# Altium PCB PCB1.PCBDOC
Units mm, origin at the board's own origin, x right, y up, seen from the top; angles counter-clockwise.
Board outline 152.4 x 101.6 mm, 2 copper layers (Top Layer, Bottom Layer); 23 components, 35 nets, 130 pads, 249 vias.
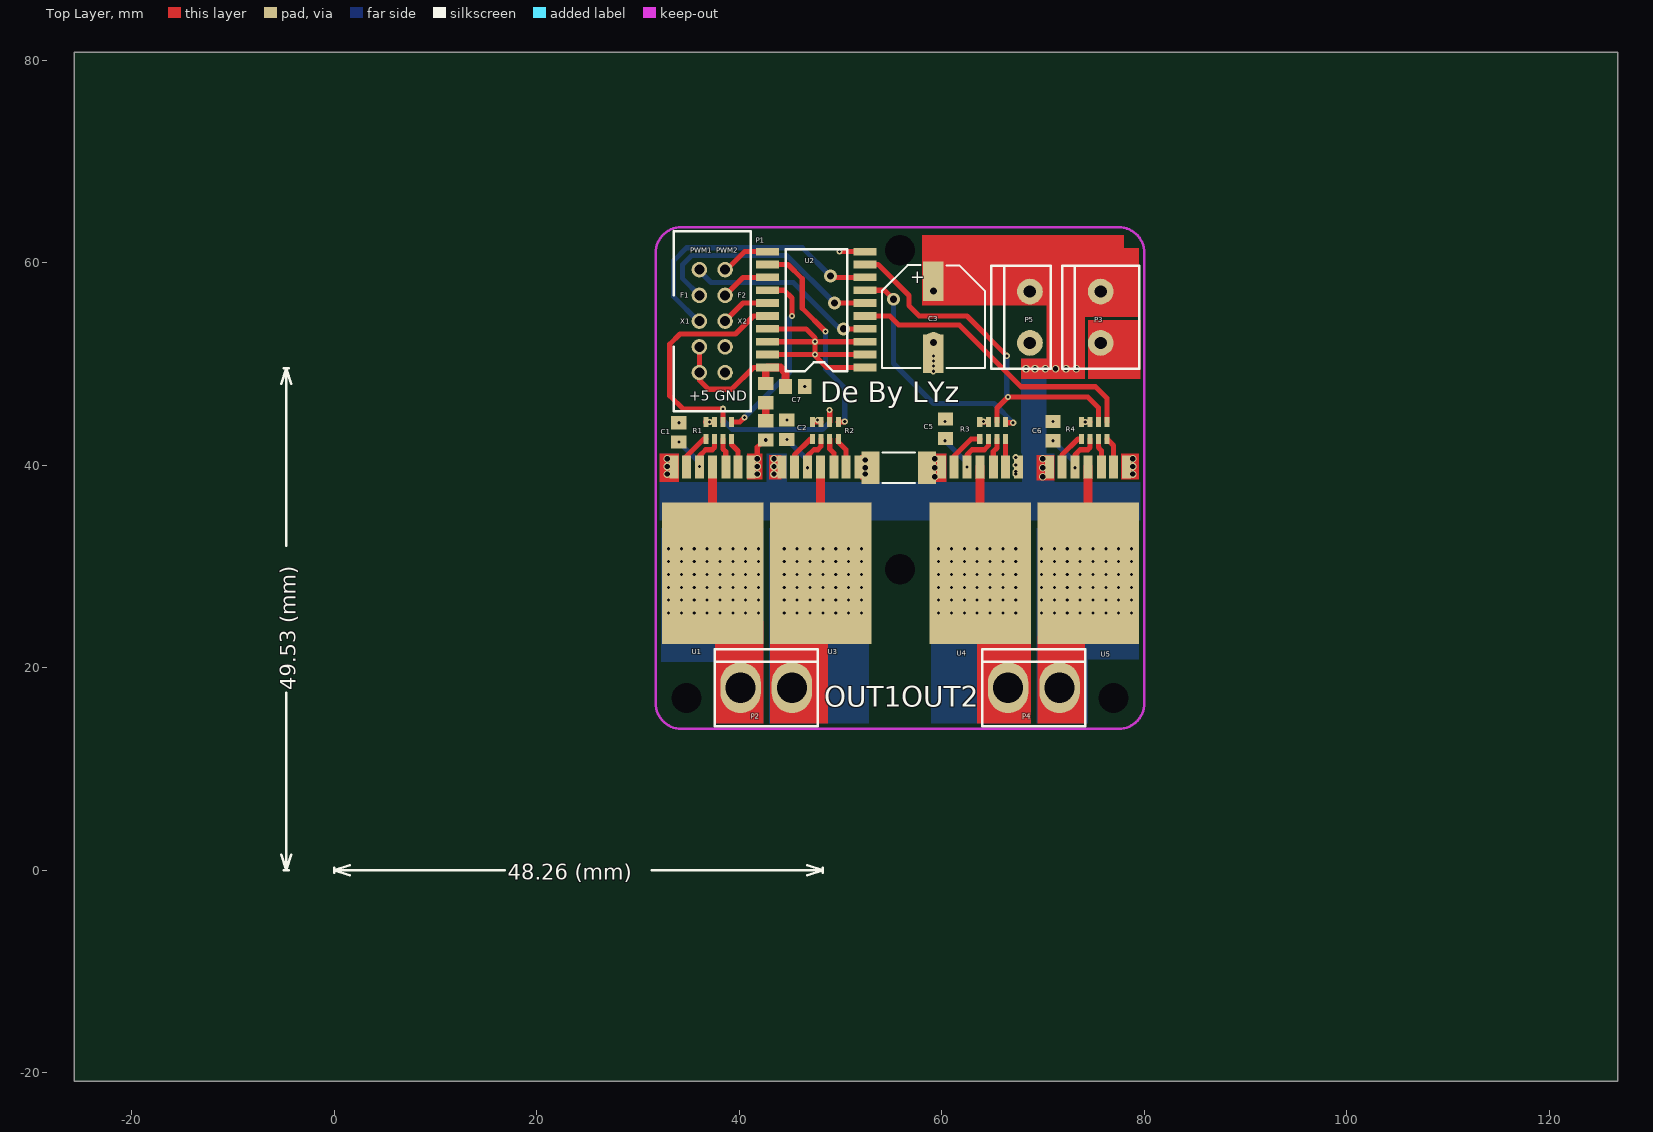
[diagram p0: Top Layer view]
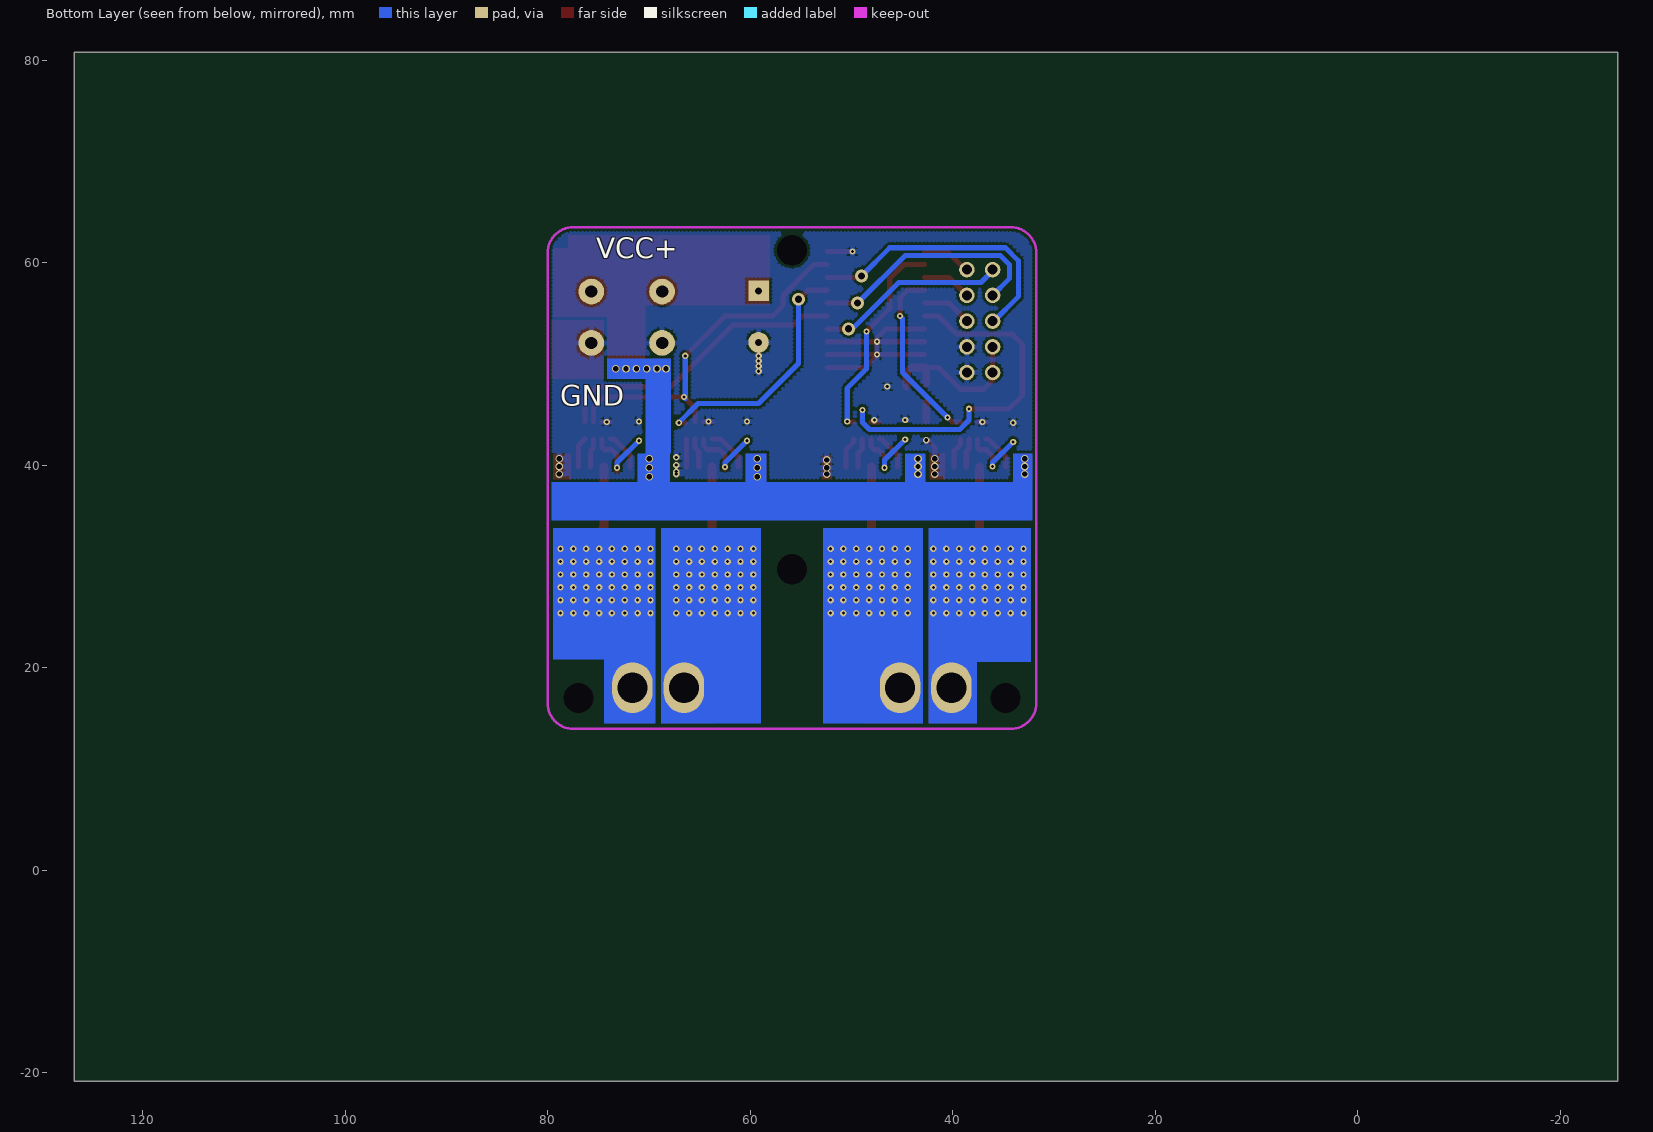
[diagram p1: Bottom Layer view, seen from below]

## Layer stack, top to bottom
Top Layer: signal copper 0.0356
Dielectric: dielectric 0.32, FR-4, Dk 4.8
Bottom Layer: signal copper 0.0356

## Board outline
-25.654,-20.828 126.746,-20.828 126.746,80.772 -25.654,80.772

## Design rules (kind name [scope] priority, off if disabled: settings)
Clearance [All] p1: gap=0.254
ComponentClearance [All] p1: gap=0.254 collisioncheckmode=3 verticalgap=0.254
PolygonConnect [All] p1: connectstyle=Relief reliefconductorwidth=0.508 reliefentries=4 polygonreliefangle="90 Angle"
RoutingVias [All] p1: holewidth=0.711 width=1.27 viastyle="Through Hole" minholewidth=0.305 minwidth=0.61 maxholewidth=12.7 maxwidth=127
SolderMaskExpansion [All] p1: expansion=0.102
TestPointUsage [All] p1: valid=0 allowmultiple=FALSE
Testpoint [All] p1: side=15 testpointundercomponent=TRUE minsize=1.016 maxsize=2.54 preferedsize=1.524 minholesize=0 maxholesize=1.016 preferedholesize=0.813 testpointgrid=0.025 style=1023 order=0123456789
Width [All] p1: maxlimit=2539.975 minlimit=0.254 preferedwidth=0.508
18 further rules are at their usual default settings.

## Classes and differential pairs
component class motordriver: C1 C2 C3 C4 C5 C6 C7 C? P1 P2 P3 P4 R1 R2 R3 R4 U1 U2 U3 U4 U5

## Components (designator, comment, footprint, x,y, rotation, side; value= is the part's Value field where it differs from the comment)
C1 "104" M0805 34.036,44.196 r270 top
C2 "104" M0805 44.704,44.45 r270 top
C3 "Cap Pol1" C2 59.182,54.61 r180 top
C5 "104" M0805 60.376,44.552 r270 top
C6 "104" M0805 70.993,44.323 r270 top
C7 "104" M0805 44.577,47.777 r0 top
P1 "Header 5X2" ISP 36.068,59.309 r0 top
P2 "Header 2" 2P 42.672,18.034 r0 top
P3 "Header 2" 2p#1 75.692,54.61 r90 top
P4 "Header 2" 2p#2 69.088,18.034 r0 top
P5 "Header 2" 2p#1 68.707,54.61 r90 top (schematic designator P3)
R1 "A" 排阻 37.973,43.434 r180 top
R2 "A" 排阻 48.514,43.434 r180 top
R3 "A" 排阻 65.024,43.434 r180 top
R4 "A" 排阻 75.057,43.434 r180 top
U1 "bts7960" bts7960 41.656,34.798 r0 top
U2 "74ALS244B" 244 46.609,55.372 r90 top
U3 "bts7960" bts7960 52.324,34.798 r0 top
U4 "bts7960" bts7960 68.072,34.798 r0 top
U5 "bts7960" bts7960 78.74,34.798 r0 top
? "Comment" 2012[0805] 42.621,47.117 r90 top
? "Comment" 2012[0805] 42.621,43.434 r90 top
? "Comment" 6332[2512] 55.753,39.751 r0 top

## Footprints (in the part's own frame and the unit in brackets; to place one, negate y for a bottom-side part, rotate by r counter-clockwise, add the part's x,y. Pads: shape width x height; smd on the part's side, far side on the other; paste and mask are expansions set on the pad)
2P [mm]
  oval 4x5 hole 3: 1(-2.54,0) 2(2.54,0)
  silkscreen extent -5.08,-3.81 5.08,3.81
2p#1 [mil]
  round 100 hole 48: 1(-100,0) 2(100,0)
  silkscreen extent -200,-150 200,150
2p#2 [mil]
  oval 157.48x196.85 hole 118.11: 1(-100,0) 2(100,0)
  silkscreen extent -200,-150 200,150
244 [mil]
  rect 30x90 smd: 1(-225,-228.74) 2(-175,-228.74) 3(-125,-228.74) 4(-75,-228.74) 5(-25,-228.74) 6(25,-228.74) 7(75,-228.74) 8(125,-228.74) 9(175,-228.74) 10(225,-228.74) 11(225,150) 12(175,150) 13(125,150) 14(75,150) 15(25,150) 16(-25,150) 17(-75,150) 18(-125,150) 19(-175,150) 20(-225,150)
2012[0805] [mm] "Chip Resistor; Body 2.0 x 1.3 mm (LxW typ)"
  rect 1.3x1.5 smd: 1(-0.95,0) 2(0.95,0)
6332[2512] [mm] "Chip Resistor; Body 6.3 x 3.2 mm (LxW typ)"
  rect 1.8x3.2 smd: 1(-2.8,0) 2(2.8,0)
  silkscreen extent -1.6,-1.5 1.6,1.5
bts7960 [mil]
  rect 35x90 smd: 1(-18.9,198.11) 2(-70.08,198.11) 3(-117.32,198.11) 4(-168.5,198.11) 5(-219.68,198.11) 6(-270.87,198.11) 7(-318.11,198.11)
  rect 393.7x551.18 smd: 8(-168.5,-215.28)
C2 [mil]
  rect 80x80 hole 27.56: 1(0,-102.5)
  rect 80x150 smd: 1(0,-142.5) 2(0,142.5)
  round 80 hole 27.56: 2(0,97.5)
  silkscreen extent -200,-202 200,198
ISP [mil]
  round 60 hole 39.37: 1(0,0) 2(100,0) 3(0,-100) 4(100,-100) 5(0,-200) 6(100,-200) 7(0,-300) 8(100,-300) 9(0,-400) 10(100,-400)
  silkscreen extent -100,-550 200,150
M0805 [mm]
  rect 1.3x1.5 smd: 1(0,0) 2(1.9,0)
排阻 [mm]
  rect 0.5x1 smd: 1(-1.27,-0.847) 2(-1.27,0.847) 3(-0.423,-0.847) 4(-0.423,0.847) 5(0.423,-0.847) 6(0.423,0.847) 7(1.27,-0.847) 8(1.27,0.847)

## Part data
C1 C2 C5 C6 C7: library part Cap, "Capacitor"
C3: "Polarized Capacitor (Radial)"
P1: "Header, 5-Pin, Dual row"
P2 P3 P4 P5: "Header, 2-Pin"
R1 R2 R3 R4: library part R1

## Free pads (board coordinates)
  round 5 on Top Overlay: 0(34.798,17.018) 0(55.88,29.718) 0(76.962,17.018)
  round 0 hole 3: 0(34.798,17.018) 0(55.88,29.718) 0(55.88,61.214) 0(76.962,17.018)
  round 1 on Top Overlay: 0(49.784,50.292)

## Via types
v1: diameter 0.635, hole 0.305, Top Layer to Bottom Layer, 189 vias
v2: diameter 0.61, hole 0.305, Top Layer to Bottom Layer, 28 vias
v3: diameter 0.762, hole 0.508, Top Layer to Bottom Layer, 27 vias
v4: diameter 1.27, hole 0.711, Top Layer to Bottom Layer, 4 vias
v5: diameter 0.635, hole 0.381, Top Layer to Bottom Layer, 1 vias

## Nets (pads, with @x,y where several pads share a name; then routed paths per layer and width w, separated by ;. In a path a pad name is that pad's centre, name@x,y a point inside that pad or via, vN(x,y) a via of type N, cw(c..) or ccw(c..) an arc to the next point about the centre after c; other vN are vias at no path point)
5V: ?.2@42.621,48.067 C7.1 P1.7 P1.9 U2.20 | length 16.2
  Top Layer w0.508: P1.7 P1.9 36.068,48.387 36.957,47.498 39.243,47.498 41.402,49.657 U2.20
  Top Layer w0.762: ?.2@42.621,48.067 U2.20@42.621,49.606 ; U2.20 44.069,49.657 44.577,49.149 C7.1
BAT: ?.2@58.553,39.751 C3.1 P3.2 P5.2 U1.7 U3.7 U4.7 U5.7
  other v3: 59.309,38.862 69.977,38.862 32.893,39.116 43.434,39.116 59.309,39.751 69.977,39.751 32.893,39.878 43.434,39.878 32.893,40.64 43.434,40.64 59.309,40.64 69.977,40.64 68.326,49.53 69.215,49.53 70.231,49.53 71.247,49.53 72.263,49.53 73.279,49.53
ENL1: P1.3 U2.6 | length 24.4
  Top Layer w0.508: v4(49.403,56.007) U2.6
  Bottom Layer w0.508: P1.3@36.068,56.388 P1.3 34.417,58.42 34.417,59.817 35.306,60.706 44.704,60.706 v4(49.403,56.007)
ENL2: P1.5 U2.8 | length 27.7
  Top Layer w0.508: v4(49.022,58.674) 49.149,58.547 U2.8
  Bottom Layer w0.508: P1.5 35.941,54.229 33.528,56.642 33.528,60.198 34.798,61.468 46.228,61.468 v4(49.022,58.674)
ENL_1: R1.1 U2.14 | length 18
  Top Layer w0.508: R1.1 40.09,44.281 v2(40.513,44.704) ; U2.14 44.45,57.277 45.212,56.515 v2(45.212,54.737)
  Bottom Layer w0.508: v2@40.488,44.679 v2(40.513,44.704) 44.958,49.149 44.958,54.483 v2(45.212,54.737)
ENL_2: R2.1 U2.12 | length 20.5
  Top Layer w0.508: U2.12 44.831,59.817 46.228,58.42 46.228,55.499 v2(48.514,53.213) ; R2.1 50.377,44.281 v2(50.419,44.323)
  Bottom Layer w0.508: v2(48.514,53.213) 48.514,49.53 50.419,47.625 v2(50.419,44.323)
ENR1: P1.4 U2.13 | length 4.9
  Top Layer w0.508: P1.4 40.386,58.547 U2.13
ENR2: P1.6 U2.15 | length 4.9
  Top Layer w0.508: P1.6 40.386,56.007 U2.15
ENR_1: R3.1 U2.7 | length 24.5
  Top Layer w0.508: U2.7 54.356,57.277 v4(55.245,56.388) ; R3.1@66.379,44.196 v2(67.056,44.196)
  Bottom Layer w0.508: v4(55.245,56.388) 55.245,50.038 59.182,46.101 65.151,46.101 v2(67.056,44.196)
ENR_2: R4.1 U2.5 | length 29.6
  Top Layer w0.508: U2.5 54.864,54.737 55.753,53.848 61.722,53.848 67.818,47.752 75.184,47.752 76.327,46.609 R4.1
GND: ?.1@42.621,42.484 ?.1@52.953,39.751 C1.1 C2.1 C3.2 C5.1 C6.1 C7.2 P1.8 P1.10 P3.1 P5.1 R1.5 R1.7 R2.5 R2.7 R3.5 R3.7 R4.5 R4.7 U1.1 U2.1 U2.2 U2.3 U2.10 U2.17 U2.18 U2.19 U3.1 U4.1 U5.1 | length 39.5
  Top Layer w0.508: R1.7 v2(37.084,44.281) R1.5 ; v3(41.783,40.64) 41.783,41.783 ?.1@42.484,42.484 ; U2.19 v2(47.498,50.927) ; U2.18 v2(47.498,52.197) ; U2.17 46.609,53.467 47.498,52.578 v2(47.498,52.197) ; R2.7 47.752,44.281 R2.5 ; v2(49.911,61.087) U2.10 ; U2.1 48.641,49.657 47.498,50.8 v2(47.498,50.927) ; U2.2 v2(47.498,50.927) ; U2.3 v2(47.498,52.197) ; R3.7 64.135,44.281 R3.5 ; R4.7 v2(74.168,44.281) R4.5 ; v2(47.498,50.927) v2(47.498,52.197)
  other v1: 67.31,39.116 67.31,39.37 67.31,40.005 67.31,40.767 47.752,44.45 59.182,49.276 59.182,49.784 59.182,50.292 59.182,50.8
  other v2: 34.036,44.196 60.325,44.323 64.135,44.323 70.993,44.323 44.704,44.45 46.477,47.777
  other v3: 41.783,39.116 52.451,39.116 78.867,39.116 52.451,39.751 41.783,39.878 78.867,39.878 52.451,40.513 78.867,40.64
  other v5: 42.621,42.484
IN_1: R1.2 U1.2 | length 3
  Top Layer w0.508: R1.2 39.243,42.037 39.876,41.404 U1.2
IN_2: R2.2 U3.2 | length 3.1
  Top Layer w0.508: R2.2 49.784,42.291 50.544,41.531 U3.2
IN_3: R3.2 U4.2 | length 2.8
  Top Layer w0.508: U4.2@66.294,39.832 R3.2
IN_4: R4.2 U5.2 | length 3
  Top Layer w0.508: R4.2 76.96,41.954 U5.2
INH_1: R1.4 U1.3 | length 2.9
  Top Layer w0.508: R1.4 38.396,41.614 38.676,41.334 U1.3
INH_2: R2.4 U3.3 | length 2.9
  Top Layer w0.508: R2.4 48.937,41.614 49.344,41.207 U3.3
INH_3: R3.4 U4.3 | length 2.9
  Top Layer w0.508: U4.3 65.092,41.343 65.447,41.698 R3.4
INH_4: R4.4 U5.3 | length 2.9
  Top Layer w0.508: R4.4 75.48,41.741 75.76,41.461 U5.3
IS_1: R1.8 U1.6 | length 3.7
  Top Layer w0.508: U1.6 34.776,40.872 36.491,42.587 R1.8
IS_2: R2.8 U3.6 | length 3.6
  Top Layer w0.508: U3.6 45.444,40.999 47.032,42.587 R2.8
IS_3: R3.8 U4.6 | length 4.3
  Top Layer w0.508: U4.6 61.192,40.872 62.907,42.587 R3.8
IS_4: R4.8 U5.6 | length 3.8
  Top Layer w0.508: U5.6 71.86,40.999 73.448,42.587 R4.8
OUT1: P2.1 U1.4 U1.8 | length 8.7
  Top Layer w0.889: U1.8@37.211,31.242 37.274,31.305 37.376,31.407 37.376,31.75 U1.4
  other v1: 33.02,25.4 34.29,25.4 35.56,25.4 36.83,25.4 38.1,25.4 39.37,25.4 40.64,25.4 41.91,25.4 33.02,26.67 34.29,26.67 35.56,26.67 36.83,26.67 38.1,26.67 39.37,26.67 40.64,26.67 41.91,26.67 33.02,27.94 34.29,27.94 35.56,27.94 36.83,27.94 38.1,27.94 39.37,27.94 40.64,27.94 41.91,27.94 33.02,29.21 34.29,29.21 35.56,29.21 36.83,29.21 38.1,29.21 39.37,29.21 40.64,29.21 41.91,29.21 33.02,30.48 34.29,30.48 35.56,30.48 36.83,30.48 38.1,30.48 39.37,30.48 40.64,30.48 41.91,30.48 33.02,31.75 34.29,31.75 35.56,31.75 36.83,31.75 38.1,31.75 39.37,31.75 40.64,31.75 41.91,31.75
OUT2: P2.2 U3.4 U3.8 | length 9.4
  Top Layer w0.889: U3.8@47.879,30.48 48.044,30.645 48.044,31.75 U3.4
  other v1: 44.45,25.4 45.72,25.4 46.99,25.4 48.26,25.4 49.53,25.4 50.8,25.4 52.07,25.4 44.45,26.67 45.72,26.67 46.99,26.67 48.26,26.67 49.53,26.67 50.8,26.67 52.07,26.67 44.45,27.94 45.72,27.94 46.99,27.94 48.26,27.94 49.53,27.94 50.8,27.94 52.07,27.94 44.45,29.21 45.72,29.21 46.99,29.21 48.26,29.21 49.53,29.21 50.8,29.21 52.07,29.21 44.45,30.48 45.72,30.48 46.99,30.48 48.26,30.48 49.53,30.48 50.8,30.48 52.07,30.48 44.45,31.75 45.72,31.75 46.99,31.75 48.26,31.75 49.53,31.75 50.8,31.75 52.07,31.75
OUT3: P4.1 U4.4 U4.8 | length 8.8
  Top Layer w0.889: U4.4 63.792,31.75 63.792,31.331 U4.8@64.008,31.115
  other v1: 59.69,25.4 60.96,25.4 62.23,25.4 63.5,25.4 64.77,25.4 66.04,25.4 67.31,25.4 59.69,26.67 60.96,26.67 62.23,26.67 63.5,26.67 64.77,26.67 66.04,26.67 67.31,26.67 59.69,27.94 60.96,27.94 62.23,27.94 63.5,27.94 64.77,27.94 66.04,27.94 67.31,27.94 59.69,29.21 60.96,29.21 62.23,29.21 63.5,29.21 64.77,29.21 66.04,29.21 67.31,29.21 59.69,30.48 60.96,30.48 62.23,30.48 63.5,30.48 64.77,30.48 66.04,30.48 67.31,30.48 59.69,31.75 60.96,31.75 62.23,31.75 63.5,31.75 64.77,31.75 66.04,31.75 67.31,31.75
OUT4: P4.2 U5.4 U5.8 | length 6.1
  Top Layer w0.889: U5.4 74.46,33.871 U5.8@74.549,33.782
  other v1: 69.85,25.4 71.12,25.4 72.39,25.4 73.66,25.4 74.93,25.4 76.2,25.4 77.47,25.4 78.74,25.4 69.85,26.67 71.12,26.67 72.39,26.67 73.66,26.67 74.93,26.67 76.2,26.67 77.47,26.67 78.74,26.67 69.85,27.94 71.12,27.94 72.39,27.94 73.66,27.94 74.93,27.94 76.2,27.94 77.47,27.94 78.74,27.94 69.85,29.21 71.12,29.21 72.39,29.21 73.66,29.21 74.93,29.21 76.2,29.21 77.47,29.21 78.74,29.21 69.85,30.48 71.12,30.48 72.39,30.48 73.66,30.48 74.93,30.48 76.2,30.48 77.47,30.48 78.74,30.48 69.85,31.75 71.12,31.75 72.39,31.75 73.66,31.75 74.93,31.75 76.2,31.75 77.47,31.75 78.74,31.75
PWM1: P1.1 U2.4 | length 18.8
  Top Layer w0.508: v4(50.292,53.467) U2.4
  Bottom Layer w0.508: P1.1 36.068,59.182 37.211,58.039 45.339,58.039 49.911,53.467 v4(50.292,53.467)
PWM2: P1.2 U2.11 | length 4.9
  Top Layer w0.508: P1.2 38.735,59.309 40.513,61.087 U2.11
PWM_1: R1.3 R2.3 U2.16 | length 37.7
  Top Layer w0.508: R1.3 v2@38.396,45.559 ; v2(38.405,45.568) 34.442,45.568 33.147,46.863 33.147,51.943 34.163,52.959 39.624,52.959 41.402,54.737 U2.16 ; R2.3 v2@48.937,45.449
  Bottom Layer w0.508: v2(38.405,45.568) 38.405,44.45 39.319,43.536 48.235,43.536 48.92,44.221 v2(48.92,45.466)
PWM_2: R3.3 R4.3 U2.9 | length 36.2
  Top Layer w0.508: U2.9 53.721,59.817 56.769,56.769 56.769,55.753 57.785,54.737 62.484,54.737 v2(66.421,50.8) ; R3.3 65.447,45.635 v2(66.548,46.736) 74.422,46.736 75.48,45.678 R4.3
  Bottom Layer w0.508: v2@66.421,46.609 66.421,46.736 v2(66.421,50.8)
SR_1: C1.2 R1.6 U1.5 | length 7
  Top Layer w0.508: U1.5 36.076,39.878 36.076,40.902 36.703,41.529 37.338,41.529 37.55,41.741 R1.6
  Bottom Layer w0.508: v2(34.036,42.296) 36.068,40.264 v2(36.068,39.878)
SR_2: C2.2 R2.6 U3.5 | length 7.2
  Top Layer w0.508: U3.5 46.744,40.902 47.371,41.529 47.752,41.529 48.091,41.868 R2.6
  Bottom Layer w0.508: v2(44.704,42.55) 46.736,40.518 v2(46.736,39.751)
SR_3: C5.2 R3.6 U4.5 | length 8
  Top Layer w0.508: U4.5@62.484,39.624 62.484,39.83 62.484,41.021 62.992,41.529 64.2,41.529 64.601,41.929 R3.6
  Bottom Layer w0.508: v2(60.325,42.418) 62.492,40.251 v2(62.492,39.83)
SR_4: C6.2 R4.6 U5.5 | length 7.8
  Top Layer w0.508: U5.5@73.152,39.37 v2(73.152,39.751) 73.152,39.83 73.152,41.021 73.66,41.529 74.422,41.529 74.634,41.741 R4.6
  Bottom Layer w0.508: v2(70.993,42.418) 73.152,40.259 v2(73.152,39.751)
pads on no net: ?.1@42.621,46.167 ?.2@42.621,44.384
copper on no net: | length 1.8
  Top Layer w0.762: 42.621,44.384 42.621,46.167

## Polygon pours and split planes (outlines as drawn)
GND on Bottom Layer "Top Layer-No Net" (hatched 90Degree grid 0 track 0.381, remove dead copper, pour order 1000): 31.75,63.5 31.75,13.97 80.01,13.97 80.01,63.5 31.75,63.5

## Keep-outs
Keep-Out Layer:
  lines w0.254: 31.75,16.51 ccw(c34.29,16.51) 34.29,13.97 77.47,13.97 ccw(c77.47,16.51) 80.01,16.51 80.01,60.96 ccw(c77.47,60.96) 77.47,63.5 34.29,63.5 ccw(c34.29,60.96) 31.75,60.96 31.75,16.51

## Other copper
Top Layer:
  rectangle net GND: 77.724,38.608 79.502,41.148
  rectangle net BAT: 69.342,38.481 71.12,41.021
  rectangle net BAT: 58.42,38.354 60.452,41.148
  rectangle net GND: 51.943,38.608 52.959,41.021
  rectangle net BAT: 42.926,38.608 44.196,41.021
  rectangle net GND: 40.767,38.608 42.291,41.148
  rectangle net BAT: 58.039,55.753 77.978,62.738
  rectangle net OUT1: 37.592,14.478 42.418,24.638
  rectangle net OUT2: 43.053,14.478 48.768,24.892
  rectangle net OUT3: 63.5,14.478 68.834,24.892
  rectangle net OUT4: 69.469,14.478 74.168,23.114
  rectangle net BAT: 70.358,48.514 74.168,58.42
  rectangle net BAT: 67.818,48.514 74.168,50.546
  rectangle net BAT: 32.131,38.354 34.036,41.148
  rectangle net BAT: 73.66,54.61 79.502,61.468
  rectangle net GND: 74.422,48.514 79.629,54.356
Bottom Layer:
  rectangle net BAT: 32.131,34.544 79.629,38.354
  rectangle net OUT4: 69.342,20.828 79.502,33.782
  rectangle net OUT3: 58.928,14.478 68.834,33.782
  rectangle net OUT2: 42.926,14.478 52.832,33.782
  rectangle net OUT1: 32.258,20.574 42.418,33.782
  rectangle net BAT: 32.131,37.084 34.036,41.148
  rectangle net BAT: 42.672,37.592 44.704,41.148
  rectangle net BAT: 58.42,37.338 60.452,41.148
  rectangle net BAT: 67.945,36.83 71.12,41.148
  rectangle net BAT: 67.818,41.148 70.358,50.546
  rectangle net BAT: 67.818,48.514 74.168,50.546
  rectangle net OUT1: 37.592,14.478 42.418,23.114
  rectangle net OUT4: 69.342,14.478 74.422,22.098

## Silkscreen, mask and mechanical layers (free items; w line width, h text height)
Top Overlay:
  lines w0.254: -5.232,1.547 -4.724,0.023 ; -5.232,48.029 -4.724,49.553 ; -4.978,0.023 -4.47,0.023 ; -4.978,49.553 -4.47,49.553 ; -4.724,17.526 -4.724,0.023 ; -4.724,32.05 -4.724,49.553 ; -4.216,1.547 -4.724,0.023 ; -4.216,48.029 -4.724,49.553 ; 0,-0.254 0,0.254 ; 1.524,-0.508 0,0 ; 1.524,0.508 0,0 ; 16.868,0 0,0 ; 31.392,0 48.26,0 ; 46.736,-0.508 48.26,0 ; 46.736,0.508 48.26,0 ; 48.26,-0.254 48.26,0.254 ; 44.577,49.276 44.577,61.341 50.673,61.341 50.673,49.276 49.276,49.276 48.387,50.165 47.371,50.165 46.482,49.276 44.577,49.276
  text "PWM1" at 35.179,60.96 h0.51
  text "PWM2" at 37.719,60.96 h0.51
  text "F1" at 34.163,56.515 h0.51
  text "F2" at 39.878,56.515 h0.51
  text "X1" at 34.163,53.975 h0.51
  text "X2" at 39.878,53.975 h0.51
  text "+5" at 35.052,46.355 h1.02
  text "GND" at 37.592,46.355 h1.02
  text "De By LYz" at 48.006,46.228 h2.03
  text "49.53 (mm)" at -3.81,17.78 h1.52 r90
  text "OUT1" at 48.387,16.129 h2.03
  text "OUT2" at 56.007,16.129 h2.03
  text "48.26 (mm)" at 17.122,-0.914 h1.52
Bottom Overlay:
  text "VCC+" at 75.184,60.452 h2.03
  text "GND" at 78.74,45.847 h2.03
Top Solder:
  rectangle: 71.501,55.245 79.121,58.928
  rectangle: 75.311,50.165 78.74,53.721
  lines w1.27: 68.834,49.53 73.279,49.53 ; 72.136,49.53 72.136,57.15
Bottom Solder:
  rectangle: 69.342,24.892 79.248,32.258
  rectangle: 59.182,24.892 67.818,32.258
  rectangle: 43.942,24.892 52.578,32.258
  rectangle: 32.512,24.892 42.418,32.258
  lines w1.27: 32.893,40.64 32.893,37.211 33.528,36.576 78.486,36.576 ; 43.434,36.576 43.434,40.64 ; 59.309,36.703 59.309,40.64 ; 69.088,37.338 69.088,49.403 69.215,49.53 73.279,49.53

## Text inside footprints (layer, text, board x,y; h text height)
C3: Top Overlay "+" at 56.896,59.118 h1.27 r180